# Altium PCB PCB_RP2350zero.pcbdoc (part 2 of 2)
Units mm, origin at the board's own origin, x right, y up, seen from the top; angles counter-clockwise.
Board outline 90.92 x 63.17 mm, 2 copper layers (Top Layer, Bottom Layer); 112 components, 143 nets, 537 pads, 289 vias.
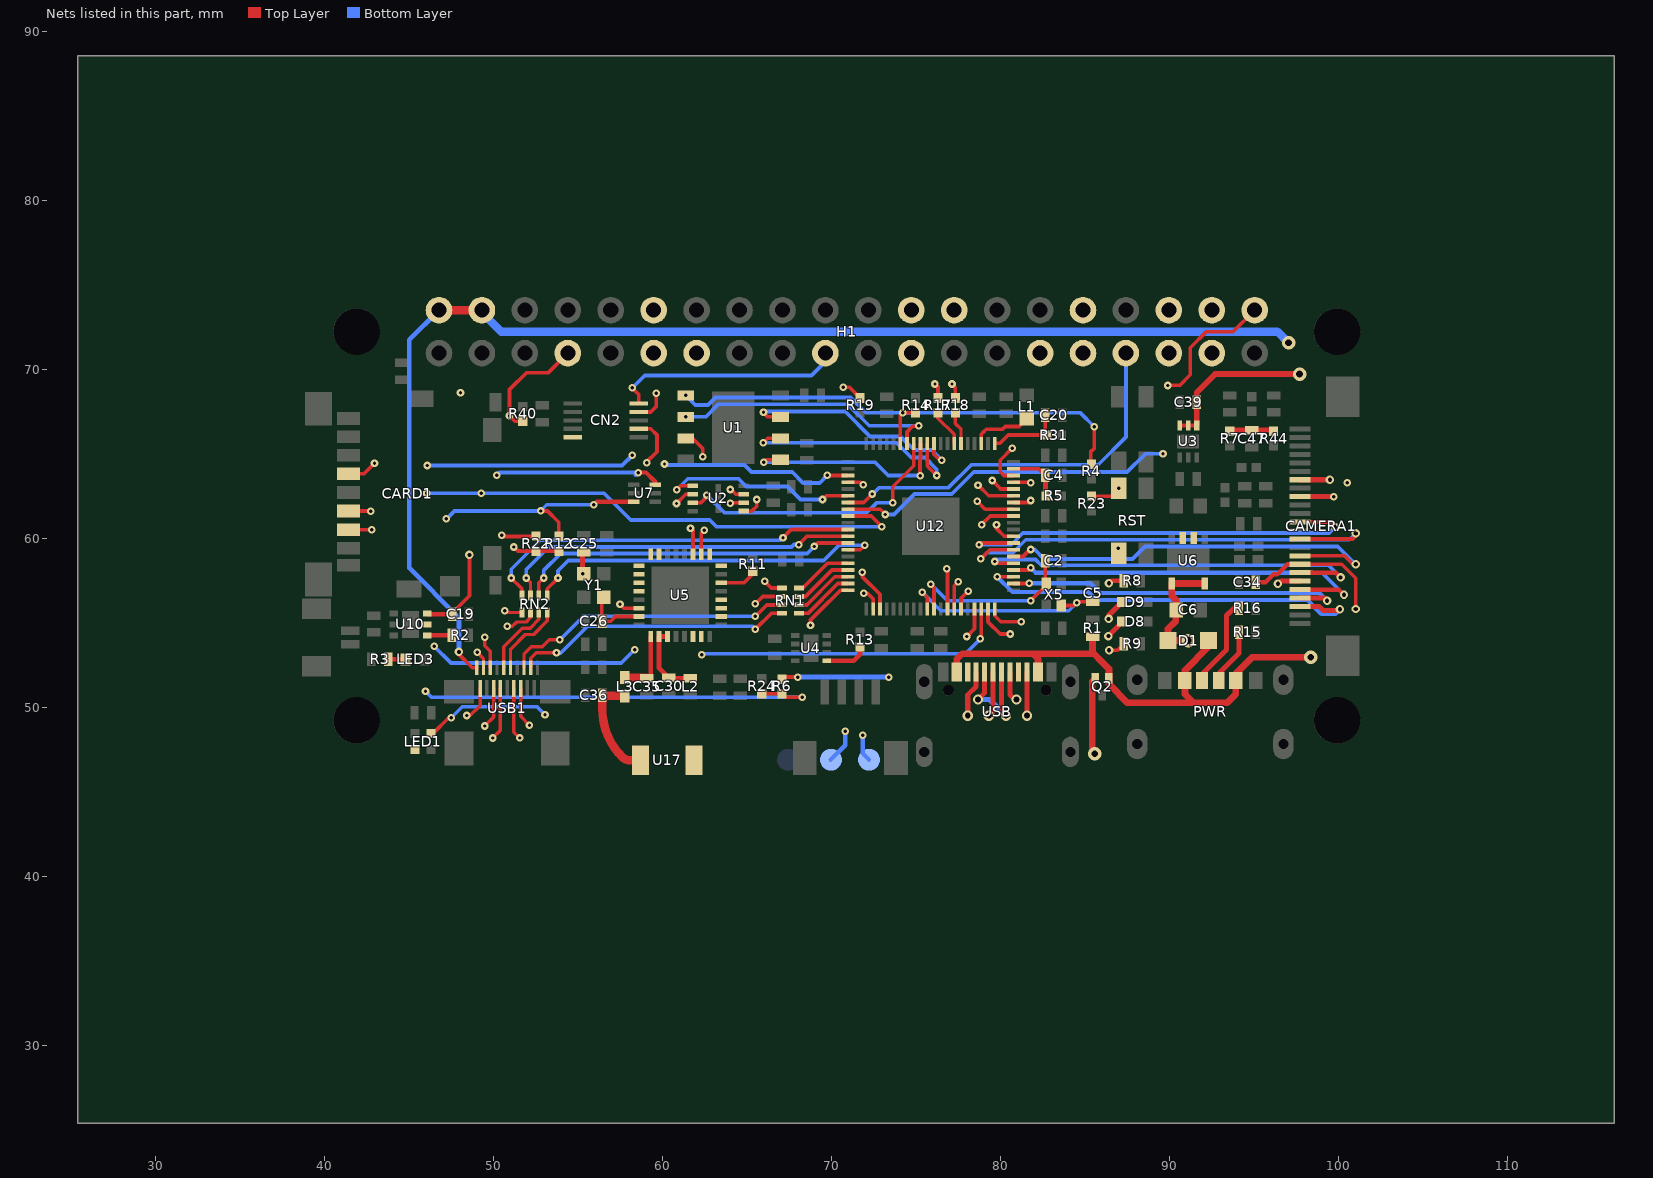
[diagram p2: the nets of this part, all layers, seen from the top]

## Via types
v1: diameter 0.45, hole 0.2, Top Layer to Bottom Layer, tented both sides, 246 vias
v2: diameter 0.5, hole 0.25, Top Layer to Bottom Layer, tented both sides, 22 vias
v3: diameter 0.8, hole 0.4, Top Layer to Bottom Layer, tented both sides, 10 vias
v4: diameter 0.6, hole 0.35, Top Layer to Bottom Layer, tented both sides, 10 vias
v5: diameter 0.62, hole 0.31, Top Layer to Bottom Layer, tented both sides, 1 vias

## Nets (pads, with @x,y where several pads share a name; then routed paths per layer and width w, separated by ;. In a path a pad name is that pad's centre, name@x,y a point inside that pad or via, vN(x,y) a via of type N, cw(c..) or ccw(c..) an arc to the next point about the centre after c; other vN are vias at no path point) (continued)
GPIO6_SCK: CARD1.5 CN2.2 H1.23 U5.19 U12.3 | length 54
  Top Layer w0.22: CARD1.5@41.432,63.828 42.333,63.828 v1(42.96,64.455) ; CN2.2@58.6,67.493 59.308,67.493 59.63,67.815 v1(59.63,68.605) ; v1@61.66,60.605 61.8,60.465 U5.19@61.8,59.067 ; v1(69.742,63.737) U12.3@70.967,63.737
  Mid-Layer 1 w0.22: v1(59.63,68.605) 59.63,64.905 v1(60.12,64.415)
  Mid-Layer 2 w0.22: v1(42.96,64.455) 44.23,65.725 58.81,65.725 v1(60.12,64.415) 61.66,62.876 v1(61.66,60.605)
  Mid-Layer 2 w0.3: v1(69.742,63.737) 69.741,64.267 73.03,67.556 73.03,69.804 74.199,70.975 H1.23@74.719,70.975
  Bottom Layer w0.22: v1(60.12,64.415) 60.18,64.355 64.849,64.355 65.271,63.934 ; 64.988,64.217 65.271,63.934 ; 65.396,63.934 65.271,63.934 ; v1(69.742,63.737) 69.299,63.294 68.321,63.294 67.681,63.934 65.271,63.934
GPIO7_MOSI: CARD1.3 CN2.1 H1.19 U5.18 U12.4 | length 55.8
  Top Layer w0.22: CARD1.3@41.432,61.628 v1(42.74,61.627) ; v1(58.21,68.915) 58.6,68.525 CN2.1@58.6,67.993 ; U5.18@62.3,59.067 62.3,60.305 v1(62.48,60.485) ; U12.4@70.967,63.337 71.708,63.337 v1(71.87,63.175)
  Mid-Layer 1 w0.22: v1(58.21,64.925) v1(58.21,68.915)
  Mid-Layer 1 w0.25: v1(42.74,61.627) 45.438,64.325 v1(46.083,64.325)
  Mid-Layer 1 w0.3: H1.19@69.639,70.975 69.71,70.975 71.3,69.385 71.3,63.745 v1(71.87,63.175)
  Mid-Layer 2 w0.22: v1(58.21,64.925) 57.96,64.676 57.96,61.785 58.679,61.064 60.47,61.064 61.501,60.035 62.029,60.035 v1(62.48,60.485)
  Bottom Layer w0.22: v1(58.21,68.915) 58.949,69.654 68.809,69.654 69.639,70.485 H1.19@69.639,70.975 ; v1@71.81,63.235 v1(71.87,63.175)
  Bottom Layer w0.25: v1(46.083,64.325) 57.61,64.325 v1(58.21,64.925)
GPIO9: CAMERA1.7 H1.33 U12.7 | length 40.7
  Top Layer w0.22: U12.7@70.967,62.137 71.912,62.137 v1(72.41,62.635)
  Top Layer w0.3: CAMERA1.7@97.727,63.481 v2(99.49,63.481)
  Mid-Layer 2 w0.3: H1.33@87.419,70.975 87.419,69.956 90.49,66.885 96.41,66.885 99.49,63.805 v2(99.49,63.481)
  Bottom Layer w0.22: v1(72.41,62.635) 72.45,62.635 72.61,62.795 ; 72.611,62.796 72.83,63.015 76.929,63.015 78.28,64.366 85.781,64.366 87.419,66.004 H1.33@87.419,70.975
GPIO10: CAMERA1.9 H1.31 U12.8 | length 41.3
  Top Layer w0.22: U12.8@70.967,61.737 72.878,61.737 v1(73.19,61.425)
  Top Layer w0.3: CAMERA1.9@97.727,62.481 v1(99.707,62.481)
  Mid-Layer 2 w0.3: H1.31@84.879,70.975 84.879,69.746 v1(89.61,65.015) 89.83,64.795 97,64.795 99.314,62.481 v1(99.707,62.481)
  Bottom Layer w0.22: v1(73.19,61.425) 73.701,61.425 74.91,62.636 77.12,62.636 78.419,63.935 87.49,63.935 88.57,65.015 v1(89.61,65.015)
GPIO11: CARD1.2 H1.7 R40.1 U12.9 | length 47.6
  Top Layer w0.22: CARD1.2@41.432,60.528 v1(42.79,60.527) ; v1(50.95,67.265) 50.95,68.816 51.938,69.804 53.228,69.804 H1.7@54.399,70.975 ; v1(50.95,67.265) 51.273,66.942 R40.1@51.73,66.942 ; U12.9@70.967,61.337 72.348,61.337 v1(72.98,60.705)
  Mid-Layer 1 w0.22: v1(42.79,60.527) 44.938,62.675 v1(46.041,62.675) ; v1(49.289,62.675) 49.289,65.604 v1(50.95,67.265)
  Bottom Layer w0.22: v1(46.041,62.675) v1(49.289,62.675) 50.12,62.675 ; 50.119,62.674 56.551,62.674 58.13,61.095 62.801,61.095 63.19,60.706 v1(72.98,60.705)
GPIO12: RN2.8 U12.11 | length 22.7
  Top Layer w0.2: v1(51.049,57.665) 51.69,57.024 RN2.8@51.69,56.625
  Top Layer w0.22: v1(67.13,60.055) 67.612,60.537 U12.11@70.967,60.537
  Bottom Layer w0.22: v1(51.049,57.665) 51.049,58.186 52.761,59.896 53.51,59.896 66.325,59.896 66.97,59.896 v1(67.13,60.055)
GPIO13: RN2.7 U12.12 | length 21.5
  Top Layer w0.2: v1(51.94,57.665) 52.19,57.415 RN2.7@52.19,56.625
  Top Layer w0.22: v1(68.06,59.645) 68.552,60.137 U12.12@70.967,60.137
  Bottom Layer w0.22: v1(51.94,57.665) 51.94,58.176 53.269,59.504 67.64,59.504 67.78,59.644 v1(68.06,59.645)
GPIO14: RN2.6 U12.13 | length 20.7
  Top Layer w0.2: RN2.6@52.69,56.625 52.69,57.387 v1(52.969,57.665)
  Top Layer w0.22: v1(68.98,59.535) 69.182,59.737 U12.13@70.967,59.737
  Bottom Layer w0.22: v1(52.969,57.665) 52.969,58.105 53.98,59.116 54.585,59.116 ; 54.12,59.116 68.561,59.116 v1(68.98,59.535)
GPIO15: RN2.5 U12.14 | length 21.6
  Top Layer w0.2: RN2.5@53.19,56.625 53.19,57.035 v1(53.82,57.665)
  Top Layer w0.22: U12.14@70.967,59.337 71.702,59.337 v1(71.97,59.605)
  Bottom Layer w0.22: v1(53.82,57.665) 53.82,58.095 54.43,58.704 69.538,58.704 70.439,59.606 v1@71.971,59.614
GPIO16: RN1.8 U12.16 | length 3.5
  Top Layer w0.22: RN1.8@68.07,57.075 68.303,57.075 69.765,58.537 U12.16@70.967,58.537
GPIO17: RN1.7 U12.17 | length 3.5
  Top Layer w0.22: RN1.7@68.07,56.575 68.463,56.575 70.025,58.137 U12.17@70.967,58.137
GPIO18: RN1.6 U12.18 | length 3.6
  Top Layer w0.22: RN1.6@68.07,56.075 68.533,56.075 70.195,57.737 U12.18@70.967,57.737
GPIO19: RN1.5 U12.19 | length 3.6
  Top Layer w0.22: RN1.5@68.07,55.575 68.613,55.575 70.375,57.337 U12.19@70.967,57.337
GPIO20: H1.12 U12.20 | length 57.5
  Top Layer w0.22: v1(68.76,54.875) 68.76,55.183 69.266,55.689 70.513,56.937 U12.20@70.967,56.937
  Mid-Layer 1 w0.22: v1(46.49,53.635) 46.49,61.875 46.99,62.375 48.049,63.435 v1(48.049,68.626) ; v1(58.35,53.425) 58.729,53.805 67.689,53.805 v1(68.76,54.875)
  Mid-Layer 2 w0.22: v1(48.049,68.626) 48.049,71.203 49.092,72.245 49.398,72.245 50.391,72.245 58.209,72.245 H1.12@59.479,73.515
  Bottom Layer w0.22: v1(46.49,53.635) 47.489,52.636 47.79,52.636 57.559,52.636 v1(58.35,53.425)
GPIO22: H1.11 U12.22 | length 28.6
  Top Layer w0.22: v1(71.91,56.755) 72.14,56.755 72.464,56.431 U12.22@72.464,55.84
  Mid-Layer 1 w0.22: H1.11@59.479,70.975 57.559,69.055 57.559,60.616 57.559,60.317 59.302,58.575 65.669,58.575 67.13,57.114 67.489,56.755 v1(71.91,56.755)
GPIO23: CN2.4 H1.13 U12.23 | length 34.3
  Top Layer w0.22: CN2.4@58.6,66.493 59.302,66.493 59.67,66.125 59.67,65.135 59.06,64.525 v1(59.06,64.483) ; v1(71.83,58.005) 71.83,57.735 72.864,56.701 U12.23@72.864,55.84
  Mid-Layer 1 w0.22: 57.97,64.035 58.418,64.483 v1(59.06,64.483) 59.06,68.948 59.707,69.595 60.639,69.595 H1.13@62.019,70.975 ; 57.971,64.036 57.971,60.965 57.97,60.475 59.44,59.005 65.83,59.005 67.55,57.285 71.11,57.285 v1(71.83,58.005)
GPIO29: R6.1 U12.37 | length 13.8
  Top Layer w0.22: R6.1@67.07,51.688 67.187,51.805 v1(68,51.805) ; v1(78.01,54.205) 78.464,54.659 U12.37@78.464,55.84
  Mid-Layer 1 w0.285: v1(73.39,51.805) 74.66,53.075 76.88,53.075 v1(78.01,54.205)
  Bottom Layer w0.285: v1(68,51.805) v1(73.39,51.805)
GPIO30: LED1.1 U12.38 | length 37
  Top Layer w0.22: LED1.1@46.305,48.47 46.424,48.471 47.361,49.405 v1(47.508,49.406) ; v1(78.81,54.075) 78.864,54.129 U12.38@78.864,55.84
  Mid-Layer 1 w0.22: v1(53.051,49.576) 55.751,52.276 61.44,52.276 62.301,53.134 v1(62.33,53.135)
  Bottom Layer w0.22: v1(47.508,49.406) 48.157,50.055 52.571,50.055 v1(53.051,49.576) ; v1(62.33,53.135) 62.38,53.185 74.75,53.185 77.92,53.185 v1(78.81,54.075)
GPIO31: C34.1 CAMERA1.17 U12.39 | length 32.4
  Top Layer w0.22: U12.39@79.264,55.84 79.263,55.072 79.98,54.356 v1(80.58,54.355) ; CAMERA1.17@97.727,58.481 100.185,58.481 101.011,57.655 v2(101.01,55.835)
  Top Layer w0.254: C34.1@95.11,57.415 95.68,57.415 96.15,57.885 96.38,57.885 96.56,58.065 96.976,58.481 CAMERA1.17@97.727,58.481
  Mid-Layer 1 w0.22: v1(80.58,54.355) 82.87,54.336 83.721,55.186 85.39,55.186 85.989,55.786 97.91,55.786 98.42,55.275 100.541,55.275 101.011,55.745 v2(101.01,55.835)
GPIO32: CAMERA1.19 U12.40 | length 19.6
  Top Layer w0.22: U12.40@79.664,55.84 79.665,55.43 80.01,55.085 v1(81.23,55.085)
  Top Layer w0.3: v2(96.41,57.325) 96.566,57.481 CAMERA1.19@97.727,57.481
  Mid-Layer 1 w0.22: v1(81.23,55.085) 82.86,56.715 95.47,56.715 96.08,57.325 v2(96.41,57.325)
GPIO33: CAMERA1.21 U12.42 | length 20.6
  Top Layer w0.22: U12.42@80.761,57.337 81.618,57.337 v1@81.65,57.305
  Top Layer w0.3: CAMERA1.21@97.727,56.481 99.164,56.481 v2(99.32,56.325)
  Bottom Layer w0.254: v1(81.7,57.365) 85.31,57.365 85.9,56.775 98.87,56.775 v2(99.32,56.325)
GPIO34: CAMERA1.22 U12.43 | length 24.7
  Top Layer w0.22: v1(79.81,57.737) U12.43@80.761,57.737
  Top Layer w0.3: CAMERA1.22@97.727,55.981 98.854,55.981 99.08,55.755 100.01,55.755 v2(100.08,55.825)
  Bottom Layer w0.254: v1(79.81,57.737) 80.711,56.835 85.189,56.835 85.659,56.365 98.161,56.365 98.969,55.557 99.812,55.557 v2@100.079,55.827
GPIO35: CAMERA1.20 U12.44 | length 23
  Top Layer w0.22: U12.44@80.761,58.137 81.642,58.137 v1(81.78,58.275)
  Top Layer w0.254: CAMERA1.20@97.727,56.981 100.014,56.981 v2(100.32,56.675)
  Bottom Layer w0.22: 98.425,57.986 99.01,57.986 v2(100.32,56.675)
  Bottom Layer w0.254: v1(81.78,58.275) 82.07,57.986 98.425,57.986
GPIO36: CAMERA1.18 U12.45 | length 24.6
  Top Layer w0.22: v1(79.66,58.645) 79.768,58.537 U12.45@80.761,58.537
  Top Layer w0.254: CAMERA1.18@97.727,57.981 99.844,57.981 v2(100.12,57.705)
  Bottom Layer w0.22: v1(79.66,58.645) 79.779,58.765 82.07,58.765 82.41,58.425 87.63,58.425 99.4,58.425 v2(100.12,57.705)
GPIO37: CAMERA1.16 U12.46 | length 24.9
  Top Layer w0.22: U12.46@80.761,58.937 81.332,58.937 v1@81.75,59.355 ; CAMERA1.16@97.727,58.981 100.348,58.981 100.854,58.475 v2(101.01,58.475)
  Bottom Layer w0.22: v1(81.78,59.355) 82.019,59.355 82.576,58.798 87.816,58.798 88.552,59.535 99.141,59.535 99.95,59.535 v2(101.01,58.475)
GPIO38: CAMERA1.14 U12.47 | length 28.5
  Top Layer w0.22: v1(78.84,58.805) 79.372,59.337 U12.47@80.761,59.337 ; CAMERA1.14@97.727,59.981 100.825,59.981 v2@101.15,60.305
  Bottom Layer w0.22: v1(78.84,58.805) 79.2,59.165 80.73,59.165 81.49,59.925 85.13,59.925 100.63,59.925 v2(101.01,60.305)
GPIO39: CAMERA1.12 H1.37 U12.48 | length 40.1
  Top Layer w0.22: v1(78.73,59.635) 78.832,59.737 U12.48@80.761,59.737 ; CAMERA1.12@97.727,60.981 99.474,60.981 v2(99.79,60.665)
  Mid-Layer 1 w0.3: v2(99.79,60.665) 99.79,61.785 100.51,62.506 v1(100.51,63.314)
  Mid-Layer 2 w0.3: H1.37@92.499,70.975 93.259,70.975 100.51,63.726 v1(100.51,63.314)
  Bottom Layer w0.22: v1(78.73,59.635) 80.63,59.635 81.32,60.325 99.45,60.325 v2(99.79,60.665)
GPIO40: H1.32 U12.49 | length 17.1
  Top Layer w0.22: v1@79.759,60.835 79.759,60.594 80.218,60.137 U12.49@80.761,60.137
  Mid-Layer 2 w0.22: v1(79.76,60.825) 80.02,60.825 80.46,61.265 80.759,61.564 81.92,61.564 82.39,62.034 82.39,69.095 83.579,70.284 83.579,72.215 H1.32@84.879,73.515
GPIO41_CS_SPI1: H1.36 U12.52 | length 22.5
  Top Layer w0.22: v1(78.88,60.825) 79.392,61.337 U12.52@80.761,61.337
  Mid-Layer 1 w0.22: v1(78.88,60.825) 80.86,62.805 84.452,62.805 91.229,69.583 91.229,72.245 H1.36@89.959,73.515
GPIO42_SCK_SPI1: H1.40 U12.53 | length 24.4
  Top Layer w0.22: v1(78.62,62.205) 79.088,61.737 U12.53@80.761,61.737 ; v1(89.884,69.055) 90.599,69.065 91.229,69.695 91.229,71.295 92.179,72.245 93.769,72.245 H1.40@95.039,73.515
  Mid-Layer 1 w0.22: v1(78.62,62.205) 79.629,62.204 81.28,63.855 84.209,63.855 87.44,67.086 89.408,69.055 v1(89.884,69.055)
GPIO43_MOSI_SPI1: H1.38 U12.54 | length 20.3
  Top Layer w0.22: U12.54@80.761,62.137 81.662,62.137 v1(81.78,62.255)
  Mid-Layer 1 w0.22: v1(81.78,62.255) 84.709,62.255 92.027,69.573 93.318,69.573 93.76,70.015 93.76,72.254 H1.38@92.499,73.515
GPIO44_MISO_SPI1: H1.35 U12.55 | length 17.6
  Top Layer w0.22: v1(78.67,63.165) 79.298,62.537 U12.55@80.761,62.537
  Mid-Layer 1 w0.22: v1(78.67,63.165) 78.99,62.845 79.7,62.845 81.11,64.255 83.97,64.255 89.959,70.245 H1.35@89.959,70.975
GPIO45: H1.24 U12.56 | length 15.2
  Top Layer w0.22: v1@79.52,63.435 79.987,62.968 79.987,62.936 U12.56@80.761,62.937
  Mid-Layer 1 w0.22: H1.24@74.719,73.515 74.719,72.936 75.43,72.225 78.06,72.225 78.53,71.755 78.53,70.941 ; 78.539,71.069 78.539,64.417 v1@79.52,63.436
  other v1: 79.52,63.435
GPIO46: H1.29 U12.57 | length 9.5
  Top Layer w0.22: U12.57@80.76,63.336 81.739,63.336 v1(81.78,63.295)
  Mid-Layer 2 w0.22: v1(81.78,63.295) 81.25,63.825 81.25,66.065 81.07,66.245 81.07,69.706 H1.29@82.339,70.975
GPIO47: H1.26 U12.58 | length 13.5
  Top Layer w0.22: v1(80.7,65.355) 79.98,64.635 79.98,63.955 80.198,63.737 U12.58@80.761,63.737
  Mid-Layer 1 w0.22: H1.26@77.259,73.515 77.55,73.515 78.83,72.235 80.3,72.235 81.03,71.505 81.03,69.666 80.7,69.336 v1(80.7,65.355)
HDMI-SCL: R22.2 U7.3 USB1.17 | length 24.5
  Top Layer w0.2: v1(49.05,53.265) 49.41,52.905 USB1.17@49.41,52.355
  Top Layer w0.22: v1(50.486,60.194) 50.552,60.128 R22.2@52.51,60.128
  Top Layer w0.25: v1(58.57,63.905) 59.03,63.906 59.571,63.365 U7.3@59.57,63.185
  Mid-Layer 1 w0.22: v1(50.2,63.745) 50.2,60.48 v1(50.486,60.194)
  Mid-Layer 2 w0.285: v1(49.05,53.265) 48.839,53.477 48.839,57.373 50.485,59.022 v1(50.486,60.194)
  Bottom Layer w0.22: v1(50.2,63.745) 50.36,63.905 v1(58.57,63.905) 58.41,63.745
HDMI-SDA: R12.2 U7.6 USB1.18 | length 27.9
  Top Layer w0.2: v1(48.41,49.535) 48.63,49.535 49.21,50.115 USB1.18@49.21,51.135
  Top Layer w0.22: v1(52.79,61.635) 53.2,61.635 53.87,60.965 R12.2@53.87,60.128
  Top Layer w0.25: v1(55.94,61.995) 56.13,62.185 U7.6@58.29,62.185
  Mid-Layer 1 w0.285: v1(47.218,61.166) 47.219,50.726 v1(48.41,49.535)
  Bottom Layer w0.22: v1(47.218,61.166) 47.688,61.635 v1(52.79,61.635) 53.15,61.995 v1(55.94,61.995)
L1_2: L1.2 U12.63 | length 3.6
  Top Layer w0.22: U12.63@78.864,65.634 78.864,66.169 79,66.305 79.16,66.465 80.12,66.465 80.29,66.635 80.69,66.635 81.11,66.635 L1.2@81.56,67.085
LED1_3: LED1.3
QSPI-CS0: R4.2 R14.2 U1.1 U12.75 | length 30.5
  Top Layer w0.22: U12.75@74.064,65.634 74.064,67.296 v1(74.22,67.452) R14.2@74.98,67.452 ; R4.2@85.38,64.198 85.33,64.248 85.33,65.125 85.54,65.335 v1(85.54,66.615)
  Bottom Layer w0.22: v1(61.38,68.47) 61.946,67.904 62.69,67.904 63.132,68.346 71.13,68.346 72.022,67.452 v1(74.22,67.452) ; v1(74.22,67.452) 84.703,67.452 v1(85.54,66.615)
QSPI-CS1: R19.2 U2.1 U12.6 | length 20.8
  Top Layer w0.22: v1(60.851,62.885) 61.091,63.125 U2.1@61.793,63.125 ; v1(69.47,62.315) 69.692,62.537 U12.6@70.967,62.537 ; v1@70.84,68.948 71.06,68.948 R19.2@71.69,68.318
  Mid-Layer 1 w0.22: v1(69.47,62.315) 70.86,63.705 70.86,68.545 70.69,68.715 v1(70.69,68.945)
  Bottom Layer w0.22: v1(60.851,62.885) 61.501,63.535 62.23,63.535 ; 61.826,63.535 64.28,63.535 64.501,63.535 64.95,63.086 65.367,63.086 67.399,63.086 68.171,62.316 v1(69.47,62.315)
QSPI-SCLK: U1.6 U2.6 U12.71 | length 20.1
  Top Layer w0.22: v1@64.05,62.095 64.08,62.125 U2.6@64.807,62.125 ; v1(65.97,65.665) 66.235,65.93 U1.6@66.98,65.93 ; U12.71@75.664,65.634 75.664,64.301 v1(76.23,63.735)
  Mid-Layer 1 w0.22: v1(64.016,62.095) 64.92,62.999 64.92,64.565 65.97,65.615 v1(65.97,65.665)
  Bottom Layer w0.22: v1(65.97,65.665) 73.849,65.665 74.719,64.795 75.53,64.795 ; 75.06,64.795 75.53,64.795 ; v1(76.23,63.735) 76.23,64.095 75.53,64.795
QSPI-SD0: U1.5 U2.5 U12.72 | length 16.2
  Top Layer w0.22: U2.5@64.808,61.625 65.29,61.625 65.58,61.915 v1(65.58,62.312) ; v1(66,64.515) 66.145,64.66 U1.5@66.98,64.66 ; v1(75.24,63.725) U12.72@75.263,65.633
  Mid-Layer 1 w0.22: v1(65.58,62.312) 65.58,64.095 v1(66,64.515)
  Bottom Layer w0.22: v1(66,64.515) 72.111,64.516 72.57,64.516 73.36,63.726 v1(75.24,63.725)
QSPI-SD1: U1.2 U2.2 U12.74 | length 23.4
  Top Layer w0.22: v1(60.83,62.075) 61.38,62.625 U2.2@61.793,62.625 ; U12.74@74.464,65.634 74.464,66.309 74.8,66.645 75.13,66.645 v1(75.16,66.675)
  Mid-Layer 1 w0.22: v1(60.83,62.075) 61.38,62.625 61.38,64.075 v1(61.38,67.2)
  Bottom Layer w0.22: v1(61.38,67.2) 62.555,67.2 63.31,67.955 70.95,67.955 72.23,66.675 v1(75.16,66.675) ; 74.45,66.675 v1@75.159,66.675
QSPI-SD2: U1.3 U2.3 U12.73 | length 20.6
  Top Layer w0.22: U1.3@61.38,65.93 61.775,65.931 62.38,65.326 62.38,65.085 ; U2.3@61.793,62.125 62.281,62.126 62.609,62.456 v1@62.609,62.575 ; v1(73.62,62.115) 73.62,63.065 74.864,64.309 U12.73@74.864,65.634
  Mid-Layer 1 w0.22: v1(62.38,64.845) 62.38,62.805 v1(62.61,62.575)
  Bottom Layer w0.22: v1(62.61,62.575) 63.65,61.536 72.09,61.536 72.659,62.105 v1(73.62,62.115)
QSPI-SD3: U1.7 U2.7 U12.70 | length 20.5
  Top Layer w0.22: v1@64.054,62.905 64.334,62.625 U2.7@64.808,62.625 ; v1(65.98,67.465) 66.245,67.2 U1.7@66.98,67.2 ; U12.70@76.064,65.634 76.064,64.989 76.408,64.645 v1(76.52,64.645)
  Mid-Layer 1 w0.22: v1@64.054,62.906 64.054,65.786 65.469,67.201 65.733,67.465 v1(65.98,67.465)
  Bottom Layer w0.22: v1(65.98,67.465) 66.03,67.516 66.619,67.516 70.81,67.516 72.281,66.045 74.09,66.045 74.9,65.235 75.93,65.235 v1(76.52,64.645)
  other v1: 64.02,62.905
R2_1: R2.1 U10.1 | length 1.5
  Top Layer w0.27: U10.1@46.09,54.275 R2.1@47.541,54.296
R3_1: LED3.1 R3.1 | length 1
  Top Layer w0.27: R3.1@43.77,52.855 LED3.1@44.804,52.855
R6_2: R6.2 R24.1 USB1.15 | length 32.9
  Top Layer w0.2: v1(49.49,54.165) 49.49,53.666 49.81,53.345 USB1.15@49.81,52.355
  Top Layer w0.22: R24.1@65.87,50.832 R6.2@67.07,50.822 ; R6.2@67.07,50.822 67.277,50.615 v1(68.27,50.615)
  Mid-Layer 2 w0.22: v1(45.98,50.975) 46.27,51.265 48.33,51.265 49.7,52.635 49.7,53.955 v1(49.49,54.165)
  Bottom Layer w0.22: v1(45.98,50.975) 46.34,50.615 v1(68.27,50.615)
R8_2: R8.2 USB.A5 | length 16.4
  Top Layer w0.27: v2(86.41,57.355) 86.557,57.502 R8.2@87.3,57.502
  Top Layer w0.3: v4(78.06,49.521) 78.06,50.755 78.56,51.255 USB.A5@78.56,52.107
  Mid-Layer 2 w0.3: v4(78.06,49.521) 78.059,50.985 78.468,51.394 80.051,51.394 83.868,55.214 84.569,55.214 86.41,57.055 v2(86.41,57.355)
R15_2: PWR.B5 R15.2 | length 3.3
  Top Layer w0.3: PWR.B5@92.911,51.594 92.911,52.016 94.1,53.205 R15.2@94.1,54.445
R16_2: PWR.A5 R16.2 | length 5.4
  Top Layer w0.3: PWR.A5@91.911,51.594 91.91,51.966 93.371,53.426 93.371,55.446 93.81,55.885 R16.2@94.11,55.885
R31_1: C20.2 R31.1 U12.61 | length 4.5
  Top Layer w0.22: U12.61@79.664,65.634 79.961,65.634 80.454,66.126 R31.1@82.721,66.126 82.654,66.194 C20.2@82.654,67.306
R44_2: C47.1 R7.2 R44.2 | length 2.7
  Top Layer w0.3: R7.2@93.56,66.348 93.627,66.415 C47.1@94.86,66.415 96.093,66.415 R44.2@96.16,66.348
RN1_1: RN1.1 USB1.8 | length 25.7
  Top Layer w0.2: USB1.8@51.21,51.135 51.21,48.555 v1(51.56,48.206)
  Top Layer w0.22: v1(66.05,57.465) 66.44,57.075 RN1.1@67.07,57.075
  Mid-Layer 1 w0.22: v1(51.56,48.206) 51.56,53.546 53.51,55.496 64.001,55.496 65.499,56.995 ; 65.5,56.995 65.97,57.465 v1(66.05,57.465)
RN1_2: RN1.2 USB1.6 | length 23.1
  Top Layer w0.2: USB1.6@51.61,51.135 51.61,49.475 v1(52.13,48.955)
  Top Layer w0.22: v1(65.5,56.145) 65.93,56.575 RN1.2@67.07,56.575
  Mid-Layer 1 w0.22: v1@52.129,48.956 52.129,53.396 53.78,55.044 64.399,55.044 v1(65.5,56.145)
RN1_3: RN1.3 USB1.5 | length 17.3
  Top Layer w0.2: USB1.5@51.81,52.355 51.81,53.185 52.226,53.601 52.885,53.601 53.3,54.015 v1(53.93,54.015)
  Top Layer w0.22: v1(65.5,55.405) 66.17,56.075 RN1.3@67.07,56.075
  Bottom Layer w0.22: v1(53.93,54.015) 55.32,55.405 v1(65.5,55.405)
RN1_4: RN1.4 USB1.3 | length 16.7
  Top Layer w0.2: USB1.3@52.21,52.355 52.21,52.926 52.52,53.236 v1(53.728,53.255)
  Top Layer w0.22: v1(65.5,54.645) 66.43,55.575 RN1.4@67.07,55.575
  Bottom Layer w0.22: v1@53.729,53.236 53.98,53.236 55.56,54.816 65.329,54.816 v1(65.5,54.645)
RN2_1: RN2.1 USB1.14 | length 10.8
  Top Layer w0.2: v1(49.48,48.915) 50.01,49.445 USB1.14@50.01,51.135 ; v1(50.68,55.725) 50.78,55.625 RN2.1@51.69,55.625
  Mid-Layer 1 w0.2: v1(49.48,48.915) 50.15,49.586 50.15,55.195 v1(50.68,55.725)
RN2_2: RN2.2 USB1.12 | length 12
  Top Layer w0.2: v1(49.97,48.205) 50.41,48.646 USB1.12@50.41,51.135 ; v1(50.82,54.805) 51.11,54.805 51.369,55.065 51.941,55.065 52.19,55.316 RN2.2@52.19,55.625
  Mid-Layer 1 w0.2: v1(49.97,48.205) 50.82,49.055 v1(50.82,54.805)
RN2_3: RN2.3 USB1.11 | length 4.4
  Top Layer w0.2: USB1.11@50.61,52.355 50.61,53.614 51.699,54.706 52.179,54.706 52.69,55.214 RN2.3@52.69,55.625
RN2_4: RN2.4 USB1.9 | length 4.5
  Top Layer w0.2: USB1.9@51.01,52.355 51.011,53.444 51.89,54.325 52.38,54.325 53.19,55.136 RN2.4@53.19,55.625
RST: R23.2 RST.1 RST.2 U12.35 | length 17.5
  Top Layer w0.22: U12.35@77.664,55.84 77.664,56.469 v1(78.08,56.885) ; R23.2@85.39,62.508 86.528,62.508 v1(87,62.98)
  Mid-Layer 1 w0.22: v1(86.96,59.435) 86.96,59.565 85.77,60.755 85.77,61.75 v1(87,62.98)
  Mid-Layer 2 w0.22: v1(78.08,56.885) 83.289,56.865 85.789,59.365 v1@86.96,59.365
S$645935: 
S$645942: 
S$651891: 
S$651895: 
S$651964: 
S$651974: 
S$651978: 
S$651988: 
S$651992: 
S$652971: 
S$652975: 
SWCLK: pad.1@69.966,46.916 U12.33 | length 16.5
  Top Layer w0.22: v1(76.81,58.215) 76.864,58.161 U12.33@76.864,55.84
  Mid-Layer 2 w0.25: v1(70.81,48.605) 70.81,50.236 73.99,53.416 76.81,56.235 v1(76.81,58.215)
  Bottom Layer w0.25: pad.1@69.95,46.915 70.81,47.775 v1(70.81,48.605)
SWDIO: pad.1@72.22,46.916 U12.34 | length 15.1
  Top Layer w0.22: U12.34@77.264,55.84 77.264,57.209 v1(77.51,57.455)
  Mid-Layer 2 w0.25: v1(71.85,48.375) 72.51,48.374 74.43,50.294 74.43,53.124 77.511,56.205 v1(77.51,57.455)
  Bottom Layer w0.25: v1(71.85,48.375) 71.85,47.285 pad.1@72.22,46.916
TFRST: CN2.6
U4_5: R13.1 U4.5 | length 2.6
  Top Layer w0.28: U4.5@69.707,52.765 71.31,52.765 71.68,53.135 R13.1@71.68,53.594
U5_1: C35.2 L3.2 U5.1 | length 3.9
  Top Layer w0.28: C35.2@59.08,51.735 59.3,51.955 U5.1@59.3,54.203
  Top Layer w0.5: L3.2@57.77,51.78 59.035,51.78 C35.2@59.08,51.735
U5_6: U5.6
U5_7: U5.7
U5_10: U5.10
U5_11: U5.11
U5_12: U5.12
U5_14: R11.2 U5.14 | length 2.2
  Top Layer w0.22: U5.14@63.482,57.385 64.821,57.386 65.342,57.907 R11.2@65.342,58.062
U5_16: U5.16
U5_17: U5.17
U5_23: U5.23
U5_24: U5.24
U5_25: U5.25
U5_26: U5.26
U5_27: U5.27
U5_28: U5.28
U6_2: U6.2
U6_3: U6.3
U10_2: U10.2
U12_30: C5.1 U12.30 X5.1 | length 12.9
  Top Layer w0.22: v1(75.36,56.835) 75.664,56.531 U12.30@75.664,55.84 ; X5.1@83.6,56.035 84.34,56.035 v1(84.52,56.215) 84.57,56.265 C5.1@85.453,56.265
  Bottom Layer w0.22: v1(75.36,56.835) 76.47,55.725 84.03,55.725 v1(84.52,56.215)
U12_31: C2.1 U12.31 X5.3 | length 10.6
  Top Layer w0.22: v1(75.88,57.305) 76.064,57.121 U12.31@76.064,55.84 ; v1(81.78,56.325) 82.7,57.245 X5.3@82.7,57.335 82.65,57.385 C2.1@82.65,58.695
  Bottom Layer w0.22: v1(75.88,57.305) 76.86,56.325 v1(81.78,56.325)
U12_66: R18.1 U12.66 | length 2
  Top Layer w0.2: R18.1@77.327,67.452 77.327,66.808 77.664,66.471 U12.66@77.664,65.634
U12_67: R17.1 U12.67 | length 2.2
  Top Layer w0.2: R17.1@76.297,67.452 76.297,67.128 77.264,66.161 U12.67@77.264,65.634
U17_1: C36.2 L3.1 U17.1 | length 6.4
  Top Layer w0.5: L3.1@57.77,50.69 56.505,50.69 56.44,50.625 56.44,49.924 ccw(c60.468,49.924) 57.62,47.075 ccw(c58.079,47.534) 58.079,46.885 U17.1@58.712,46.885
U17_2: U17.2
USB_A8: USB.A8
USB_B5: R9.2 USB.B5 | length 11.2
  Top Layer w0.22: v2(86.42,53.395) 86.92,53.395 R9.2@87.3,53.775
  Top Layer w0.3: v4(81.56,49.521) USB.B5@81.56,52.107
  Mid-Layer 2 w0.3: v4(81.56,49.521) 81.56,51.505 83.45,53.395 v2(86.42,53.395)
USB_B8: USB.B8
USB_D+: D8.1 R17.2 USB.A6 USB.B6 | length 37.4
  Top Layer w0.22: v1(76.12,69.145) 76.297,68.968 R17.2@76.297,68.318
  Top Layer w0.3: v4(79.306,49.521) 79.56,49.775 USB.A6@79.56,52.107 ; USB.B6@80.56,52.107 80.56,50.764 v4@80.842,50.481 ; v2(86.38,54.235) 87.19,55.045 D8.1@87.19,55.085
  Mid-Layer 1 w0.2: v1(76.12,69.145) 76.449,68.816 76.449,67.8 76.449,65.466 77.21,64.705 77.38,64.535 77.38,59.165 77.38,58.445 78.93,56.895 79.65,56.175 79.65,53.735
  Mid-Layer 1 w0.22: v4(79.306,49.521) 79.306,53.391 79.638,53.723
  Mid-Layer 2 w0.3: v4(79.306,49.521) 80.27,50.485 v4(80.954,50.485) 80.954,51.629 83.18,53.855 86,53.855 v2(86.38,54.235)
USB_D-: D9.1 R18.2 USB.A7 USB.B7 | length 39.3
  Top Layer w0.22: v1(77.13,69.145) 77.327,68.948 R18.2@77.327,68.318
  Top Layer w0.3: v4(78.666,50.481) 79.06,50.875 USB.B7@79.06,52.107 ; USB.A7@80.06,52.107 80.06,49.791 v4@80.33,49.521 ; v2(86.39,55.245) 86.39,55.444 D9.1@87.19,56.244
  Mid-Layer 1 w0.2: v1(77.13,69.145) 76.801,68.816 76.801,67.8 76.801,65.612 77.562,64.851 77.732,64.681 77.732,59.165 77.732,58.591 79.282,57.041 80.002,56.321 80.002,53.735
  Mid-Layer 1 w0.22: 80.014,53.723 80.314,53.423 v4(80.314,49.521)
  Mid-Layer 1 w0.3: v4(80.314,49.521) 80.315,51.089 83.97,54.744 85.601,54.744 86.101,55.245 v2(86.39,55.245)
  Bottom Layer w0.3: v4(78.666,50.481) 79.354,50.481 v4(80.314,49.521)
VBUS: C19.1 D1.1 H1.2 H1.4 PWR.A9 PWR.B9 Q2.1 R1.2 R12.1 R22.1 U10.3 USB1.19 USB.A4B9 USB.B4A9 | length 146.8
  Top Layer w0.22: C19.1@47.55,55.535 47.55,55.585 48.582,56.617 v2(48.582,59.037) ; v2(47.96,53.295) 47.96,53.144 48.75,52.354 USB1.19@49.01,52.355 ; v1(51.21,59.505) 51.453,59.262 R22.1@52.51,59.262 R12.1@53.87,59.262
  Top Layer w0.27: U10.3@46.09,55.575 46.13,55.535 C19.1@47.55,55.535
  Top Layer w0.4: USB.A4B9@77.41,52.107 77.41,52.865 77.73,53.185 81.92,53.185 82.21,52.895 USB.B4A9@82.21,52.107 ; 81.506,53.185 85.519,53.185 ; R1.2@85.443,54.185 85.443,53.262 85.519,53.185 ; PWR.B9@90.911,51.594 90.911,52.206 92.31,53.605 D1.1@92.31,53.965 ; PWR.B9@90.911,51.594 90.912,50.792 91.42,50.284 ; v3(98.35,52.985) 94.9,52.985 93.911,51.996 PWR.A9@93.911,51.594 93.912,50.787 93.411,50.284 91.42,50.284 ; 85.519,53.185 86.01,52.695 86.41,52.294 Q2.1@86.41,51.735 86.41,51.385 87.511,50.284 91.42,50.284
  Top Layer w0.5: H1.2@46.779,73.515 H1.4@49.319,73.515
  Mid-Layer 1 w0.22: v2(47.96,53.295) 47.96,58.414 48.215,58.669 v2(48.582,59.037) 49.05,59.504 v1(51.21,59.505)
  Mid-Layer 2 w0.4: v3(97.04,71.585) 101.78,66.845 101.78,55.506 99.261,52.984 v3(98.35,52.985)
  Bottom Layer w0.285: 45.019,58.501 45.019,58.265 47.96,55.324 v2(47.96,53.295) ; 45.019,58.502 45.019,60.395 45.019,71.755 H1.2@46.779,73.515
  Bottom Layer w0.5: H1.4@49.319,73.515 49.319,73.376 50.45,72.245 96.38,72.245 v3(97.04,71.585)
VDD33: C30.1 L2.2 U5.2 U5.3 | length 4.4
  Top Layer w0.28: U5.2@59.8,54.203 U5.3@60.3,54.203
  Top Layer w0.285: U5.2@59.8,54.203 59.8,52.336 C30.1@60.371,51.765
  Top Layer w0.3: C30.1@60.371,51.765 60.401,51.735 L2.2@61.631,51.735
VDDA: C4.2 R5.1 U12.59 | length 2.9
  Top Layer w0.22: U12.59@80.761,64.137 82.254,64.137 C4.2@82.654,63.737
  Top Layer w0.3: 82.654,63.322 82.654,62.598 R5.1@82.727,62.525
VUSB: C6.1 C39.2 D1.2 Q2.2 U3.1 U3.2 U3.3 U6.5 U6.8 | length 59.8
  Top Layer w0.25: U3.3@90.61,66.696 U3.2@91.11,66.696 U3.1@91.61,66.696
  Top Layer w0.35: U3.1@91.61,66.696 C39.2@91.61,68.055 ; C39.2@91.61,68.055 91.61,68.646 92.7,69.736 v3(97.691,69.736)
  Top Layer w0.4: v3(85.58,47.275) 85.43,47.425 85.43,51.555 Q2.2@85.61,51.735 ; U6.5@90.135,57.337 U6.8@92.085,57.337 ; U6.5@90.135,57.338 90.135,56.601 90.399,56.335 C6.1@90.41,55.775 ; C6.1@90.41,55.775 90.37,55.735 90.37,55.125 89.91,54.665 D1.2@89.91,53.965 v3(91.11,53.965)
  Mid-Layer 1 w0.4: v3(91.11,53.965) 100.778,53.965 102.629,55.816 102.629,64.795 v3(97.691,69.736)
  Mid-Layer 2 w0.4: v3(85.58,47.275) 85.58,48.645 86.6,49.665 89.46,49.665 91.11,51.315 v3(91.11,53.965)
XTALN: C25.1 U5.30 Y1.3 | length 5.7
  Top Layer w0.22: v1(57.49,56.115) 57.72,55.885 U5.30@58.618,55.885
  Top Layer w0.3: v1(55.28,57.925) C25.1@55.28,59.195
  Mid-Layer 2 w0.25: v1(55.28,57.925) 55.281,57.546 56.711,56.116 v1(57.49,56.115)
XTALP: C26.1 U5.31 Y1.1 | length 3.7
  Top Layer w0.22: C26.1@56.41,55.115 56.41,56.455 Y1.1@56.48,56.525 ; C26.1@56.44,55.115 56.94,55.115 57.21,55.385 U5.31@58.618,55.385
pads on no net: H1.27 H1.28 USB1.1 USB1.2 USB.
copper on no net:
  other v5: 38.41,45.745

## Polygon pours and split planes (outlines as drawn)
GND on Bottom Layer (solid): 38.41,45.745 55.26,45.745 55.26,49.475 66.71,49.475 66.71,45.745 103.41,45.745 103.41,75.745 38.41,75.745
3V3 on Mid-Layer 2 (solid): 38.41,45.745 55.26,45.745 55.26,49.475 66.71,49.475 66.71,45.745 103.41,45.745 103.41,75.745 38.41,75.745
GND on Mid-Layer 1 (solid): 38.41,45.745 55.26,45.745 55.26,49.475 66.71,49.475 66.71,45.745 103.41,45.745 103.41,75.745 38.41,75.745
GND on Top Layer (solid): 38.41,45.745 55.26,45.745 55.26,49.475 66.71,49.475 66.71,45.745 103.41,45.745 103.41,75.745 38.41,75.745

## Keep-outs
Keep-Out Layer:
  lines w0.254: 38.41,48.745 ccw(c41.41,48.745) 41.41,45.745 ; 38.41,72.745 cw(c41.41,72.745) 41.41,75.745 ; 100.41,45.745 ccw(c100.41,48.745) 103.41,48.745 ; 100.41,75.745 cw(c100.41,72.745) 103.41,72.745

## Silkscreen, mask and mechanical layers (free items; w line width, h text height)
Top Overlay:
  text "CircuitART" at 56.9,47.925 h2.3 r1
  text "2350" at 62.633,46.575 h2 r359
  text "3V3" at 71.013,46.485 h1.5 r90
  text "SDA" at 72.043,46.385 h1.5 r92
  text "GND" at 70.193,46.355 h1.5 r90
  text "SCL" at 72.893,46.345 h1.5 r91
  text "IO30" at 43.79,45.905 h1.7 r358
Bottom Overlay:
  rectangle: 94.27,70.195 95.82,71.765
  rectangle: 86.65,72.735 88.2,74.305
  rectangle: 81.57,72.735 83.12,74.305
  rectangle: 76.49,70.195 78.04,71.765
  rectangle: 68.87,72.735 70.42,74.305
  rectangle: 51.09,72.735 52.64,74.305
  rectangle: 56.17,70.195 57.72,71.765
  rectangle: 61.25,72.735 62.8,74.305
  lines w0.25 net S$645935: 45.578,66.162 45.578,65.745 95.946,65.745 95.946,69.873 45.705,69.873
  lines w0.25 net S$645942: 45.7,60.935 95.583,60.935
  lines w0.25 net S$651891: 45.066,74.001 45.13,74.001 45.578,73.553
  lines w0.25 net S$651895: 45.066,73.105 45.13,73.105 45.578,73.553
  lines w0.25 net S$651964: 45.578,60.935 45.578,65.137 95.946,65.137 95.946,60.935 95.461,60.935
  lines w0.25 net S$651974: 96.074,63.025 ccw(c96.074,65.713) 98.762,65.713 98.762,68.849
  lines w0.25 net S$651978: 96.522,71.025 cw(c96.522,68.785) 98.762,68.785 98.762,68.345
  lines w0.25 net S$651988: 96.522,71.025 97.162,71.665 ; 97.162,71.665 97.162,71.665
  lines w0.25 net S$651992: 96.522,71.025 97.162,70.385
  lines w0.25 net S$652971: 45.578,66.161 45.578,69.873 45.706,69.873
  lines w0.25 net S$652975: 45.578,67.806 44.588,68.797 cw(c46.368,70.577) 43.85,70.577 43.85,71.928 cw(c45.38,71.928) 44.298,73.009 44.322,73.033 cw(c45.578,71.776) 45.578,73.553
  text "vBUS" at 47.454,69.745 h1.8 r93
  text "vBUS" at 49.994,69.745 h1.8 r93
  text "GND" at 52.656,69.751 h2 r90
  text "IO0" at 55.196,69.751 h1.8 r92
  text "IO1" at 57.736,69.751 h2 r89
  text "IO20" at 60.276,69.751 h2 r92
  text "GND" at 62.816,69.751 h2 r90
  text "IO26" at 65.356,69.751 h2 r90
  text "IO21" at 67.896,69.751 h2 r90
  text "GND" at 70.436,69.751 h2 r90
  text "IO27" at 72.976,69.751 h2 r90
  text "IO45" at 75.516,69.751 h2 r90
  text "IO47" at 78.056,69.751 h2 r90
  text "GND" at 83.136,69.751 h2 r90
  text "IO40" at 85.676,69.751 h2 r92
  text "GND" at 88.216,69.751 h2 r90
  text "IO41" at 90.756,69.751 h2 r90
  text "IO43" at 93.296,69.751 h2 r90
  text "IO42" at 95.836,69.751 h2 r90
  text "3v3" at 47.576,64.951 h2 r90
  text "IO2" at 50.116,64.951 h2 r90
  text "IO3" at 52.656,64.951 h2 r88
  text "IO11" at 55.196,64.951 h2 r90
  text "GND" at 57.736,64.951 h2 r90
  text "IO22" at 60.276,64.951 h2 r90
  text "IO23" at 62.816,64.951 h2 r90
  text "IO5" at 65.356,64.951 h2 r89
  text "3v3" at 67.896,64.951 h2 r90
  text "IO7" at 70.436,64.951 h2 r87
  text "IO4" at 72.976,64.951 h2 r90
  text "IO6" at 75.516,64.951 h2 r87
  text "GND" at 78.056,64.951 h2 r90
  text "IO46" at 83.136,64.951 h2 r90
  text "IO10" at 85.676,64.951 h2 r92
  text "IO9" at 88.216,64.951 h2 r89
  text "IO44" at 90.756,64.951 h2 r90
  text "IO39" at 93.296,64.951 h2 r89
  text "GND" at 95.836,64.951 h2 r90
  text "RP2350" at 63.196,50.665 h8 r1
  text "zeroW" at 63.376,46.095 h8 r358